# Altium PCB Hopper.PcbDoc
Units mm, origin at the board's own origin, x right, y up, seen from the top; angles counter-clockwise.
Board outline 62.5 x 37.5 mm, 2 copper layers (Top Layer, Bottom Layer), stack 1.58 mm thick; 97 components, 47 nets, 256 pads, 58 vias.
Unrouted connection lines stored in the file: 16.
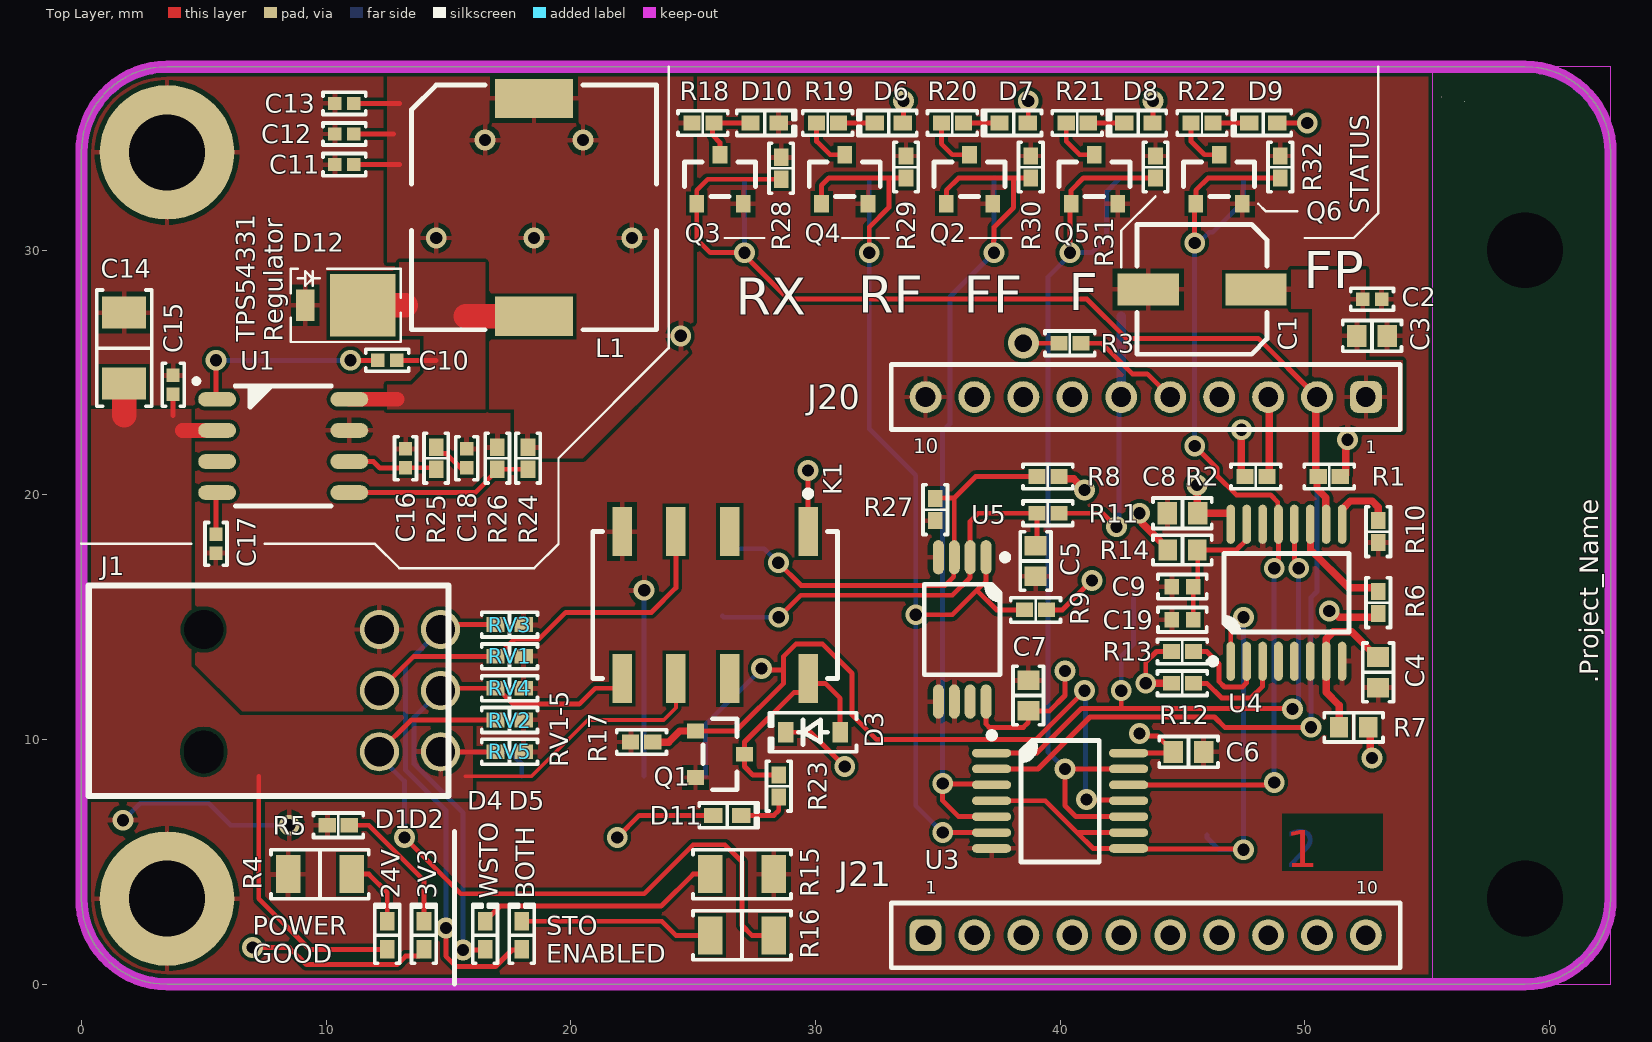
[diagram p0: Top Layer view]
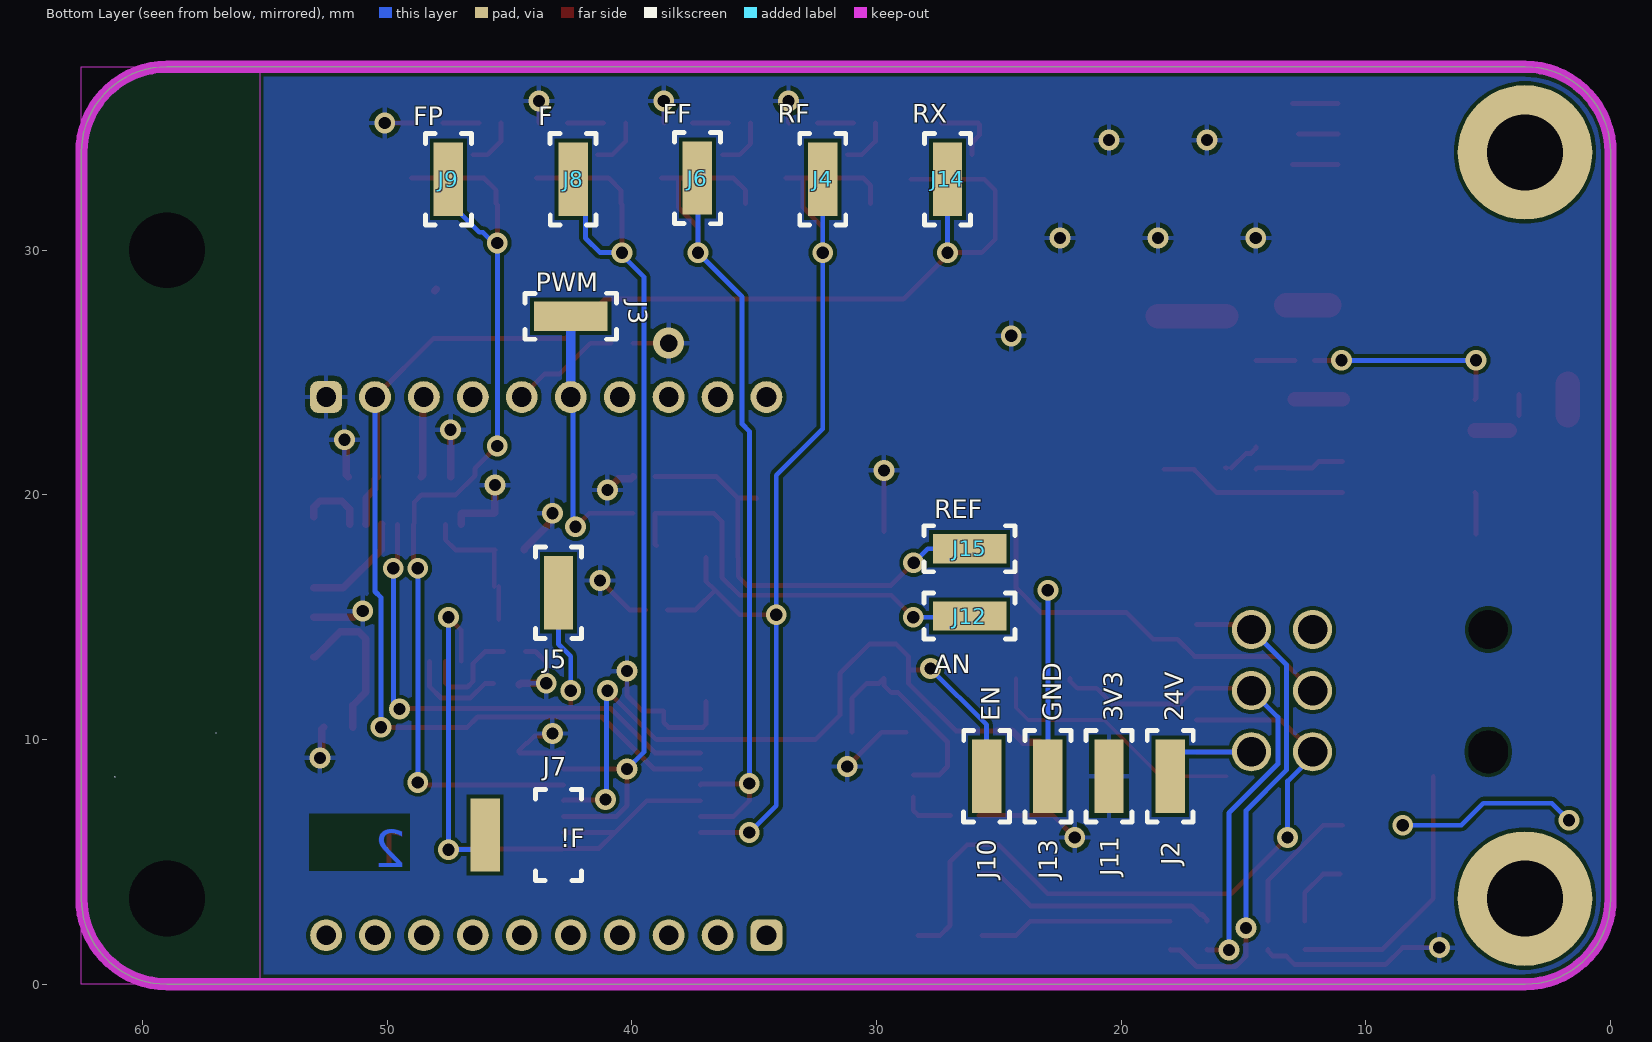
[diagram p1: Bottom Layer view, seen from below]

## Layer stack, top to bottom
Top Solder: solder mask 0.01, Solder Resist, Dk 3.5
Top Layer: signal copper 0.035
Dielectric 1: dielectric 1.51, FR-4, Dk 4.8
Bottom Layer: signal copper 0.035
Bottom Solder: solder mask 0.01, Solder Resist, Dk 3.5

## Board outline
0,3.5 0,34 cw(c3.5,34) 3.5,37.5 59,37.5 cw(c59,34) 62.5,34 62.5,3.5 cw(c59,3.5) 59,0 3.5,0 cw(c3.5,3.5)

## Design rules (kind name [scope] priority, off if disabled: settings)
BoardOutlineClearance [All] p1: gap=0.25 ignorepadtopadclearanceinfootprint=FALSE except(0: Arc-SplitContinuation Track-SplitContinuation SMDPad-SplitContinuation THPad-SplitContinuation Via-SplitContinuation Fill-SplitContinuation Poly-SplitContinuation Region-SplitContinuation Text-SplitContinuation)
Clearance Clearance-xPP-xTP-xTT [All] p1: gap=0.15 ignorepadtopadclearanceinfootprint=FALSE except(0: Arc-Hole Track-Hole SMDPad-Hole THPad-Hole Via-Hole Fill-Hole Poly-Hole Region-Hole Text-Hole)
ComponentClearance [All] p1: gap=0.25 collisioncheckmode=3 verticalgap=0.25 showdistances=FALSE
DiffPairsRouting [All] p1: maxlimit=0.25 minlimit=0.25 mostfreqgap=0.25 toplayer_minwidth=0.381 toplayer_maxwidth=0.381 toplayer_prefwidth=0.381 bottomlayer_minwidth=0.381 bottomlayer_maxwidth=0.381 bottomlayer_prefwidth=0.381 maxuncoupledlength=12.5
Height [All] p1: minheight=0 maxheight=25 prefheight=12.5
HoleSize HoleSize-PTH [All] p1: absolutevalues=TRUE maxlimit=10 minlimit=0.25 maxpercent=80.000 minpercent=20.000
HoleToHoleClearance [All] p1: gap=0.35 allowstackedmicrovias=TRUE
MinimumAnnularRing "Minimum IAR  >0.45mm" [((ObjectKind = 'Pad') OR (ObjectKind = 'Via')) And (Layer = 'MultiLayer') And (HoleDiameter > AsMM(0.45))] p1: minimumring=0.175 // minimum inner annular ring for pads > 0.45mm finished hole size
MinimumAnnularRing "Minimum IAR <=0.45mm" [((ObjectKind = 'Pad') OR (ObjectKind = 'Via')) And (Layer = 'MultiLayer') And (HoleDiameter <= AsMM(0.45))] p2: minimumring=0.175 // minimum inner annular ring for pads <= 0.45mm finished hole size
MinimumSolderMaskSliver [All] p1: minsoldermaskwidth=0.08
PlaneClearance PlaneClearance-IPI [All] p1: clearance=0.25
PlaneConnect [All] p1: planeconnectstyle=Relief reliefexpansion=0.175 reliefentries=4 reliefconductorwidth=0.2 reliefairgap=0.2
PolygonConnect PolygonConnect-xTW [All] p1: connectstyle=Relief reliefconductorwidth=0.2 reliefentries=4 polygonreliefangle="90 Angle" airgapwidth=0.2
RoomDefinition Hopper [InComponentClass('Hopper')] p1: confinementstyle=ConfineIn formatcopy=TRUE lockcomponents=FALSE outline 63.7,1.5 74.1,1.5 74.1,25.6 63.7,25.6
RoutingCorners [All] p1: cornerstyle=45-Degree minsetback=2.5 maxsetback=2.5
RoutingVias "RoutingVias > 0.45mm" [(ObjectKind = 'Via') And (HoleDiameter > AsMM(0.45))] p1: holewidth=0.5 width=0.85 viastyle="Through Hole" minholewidth=0.5 minwidth=0.85 maxholewidth=0.9 maxwidth=1.25 // finishet hole size > 0.45mm
RoutingVias "RoutingVias <= 0.45mm" [(ObjectKind = 'Via') And (HoleDiameter <= AsMM(0.45))] p2: holewidth=0.3 width=0.65 viastyle="Through Hole" minholewidth=0.25 minwidth=0.6 maxholewidth=0.45 maxwidth=0.8 // finishet hole size <= 0.45mm
SilkToSilkClearance [All] p1: silktosilkclearance=0.2
SilkToSolderMaskClearance SilkscreenOverComponentPads [IsPad] p1: minsilkscreentomaskgap=0.1 clearancetoexposedcopper=TRUE
SolderMaskExpansion [All] p1: expansion=0 istentingtop=FALSE
UnRoutedNet [All] p1: checkbadconnections=TRUE
Width Width-xTW [All] p1: maxlimit=1.5 minlimit=0.15 preferedwidth=0.2
18 further rules are at their usual default settings.

## Components (designator, comment, footprint, x,y, rotation, side; value= is the part's Value field where it differs from the comment)
C1 "100uF" "CAP ALSMD ELEC 5.3MM H5.8MM" 45.8,28.4 r180 top
C2 "100nF" "CAP 0402_1005 RF" 52.75,28 r180 top
C3 "47pF" "CAP 0603_1608 RF" 52.75,26.5 r180 top
C4 "1uF" "CAP 0603_1608 RF" 53,12.75 r90 top
C5 "10uF" "CAP 0603_1608 RF" 39,17.3 r90 top
C6 "100nF" "CAP 0603_1608 RF" 45.25,9.5 r180 top
C7 "100nF" "CAP 0603_1608 RF" 38.7,11.8 r270 top
C8 "100nF" "CAP 0603_1608 RF" 45,19.25 r0 top
C9 "10uF" "CAP 0402_1005" 45,16.25 r0 top
C10 "100nF" "CAP 0402_1005 RF" 12.5,25.5 r0 top
C11 "100nF" "CAP 0402_1005 RF" 10.75,33.5 r0 top
C12 "10uF" "CAP 0402_1005 RF" 10.75,34.75 r0 top
C13 "10uF" "CAP 0402_1005 RF" 10.75,36 r0 top
C14 "10uF" "CAP 1206_3216" 1.75,26 r270 top
C15 "100nF" "CAP 0402_1005 RF" 3.75,24.5 r270 top
C16 "10pF" "CAP 0402_1005 RF" 13.25,21.5 r90 top
C17 "10nF" "CAP 0402_1005 RF" 5.5,18 r90 top
C18 "3.9nF" "CAP 0402_1005 RF" 15.75,21.5 r270 top
C19 "10uF" "CAP 0402_1005" 45,14.9 r0 top
D1 "150040VS73240" "LED 0402_1005 GREEN" 12.5,2 r90 top
D2 "150040VS73240" "LED 0402_1005 GREEN" 14,2 r90 top
D3 "1N4148" SOD323 29.9,10.3 r180 top
D4 "150040VS73240" "LED 0402_1005 GREEN" 16.5,2 r90 top
D5 "150040VS73240" "LED 0402_1005 GREEN" 18,2 r90 top
D6 "150040RS73240" "LED 0402_1005 RED" 33,35.2 r180 top
D7 "150040RS73240" "LED 0402_1005 RED" 38.1,35.2 r180 top
D8 "150040RS73240" "LED 0402_1005 RED" 43.2,35.2 r180 top
D9 "150040RS73240" "LED 0402_1005 RED" 48.3,35.2 r180 top
D10 "150040RS73240" "LED 0402_1005 RED" 27.925,35.2 r0 top
D11 "150040RS73240" "LED 0402_1005 RED" 26.4,6.9 r0 top
D12 "SS3P5-M3/84A" DO-220AA 9.149,27.75 r0 top
J1 "105314-1206" "MOLEX 1053141206" 5,12 r270 top locked
J2 "5015" FP-5015-MFG-RF#1 18,8.5 r270 bottom
J3 "5015" FP-5015-MFG-RF#1 42.5,27.3 r0 bottom
J4 "5015" FP-5015-MFG-RF#1 32.2,32.9 r270 bottom
J5 "5015" FP-5015-MFG-RF#1 43,16 r90 bottom
J6 "5015" FP-5015-MFG-RF#1 37.325,32.95 r270 bottom
J7 "5015" FP-5015-MFG-RF#2 43,6.1 r90 bottom
J8 "5015" FP-5015-MFG-RF#1 42.4,32.9 r270 bottom
J9 "5015" FP-5015-MFG-RF#1 47.5,32.9 r270 bottom
J10 "5015" FP-5015-MFG-RF#1 25.5,8.5 r90 bottom
J11 "5015" FP-5015-MFG-RF#1 20.5,8.5 r270 bottom
J12 "5015" FP-5015-MFG-RF#1 26.2,15.05 r0 bottom
J13 "5015" FP-5015-MFG-RF#1 23,8.5 r270 bottom
J14 "5015" FP-5015-MFG-RF#1 27.1,32.9 r270 bottom
J15 "5015" FP-5015-MFG-RF#1 26.2,17.8 r0 bottom
J20 "62001011821" 62001011821 43.5,24 r180 top
J21 "62001011821" 62001011821 43.5,2 r0 top
K1 "1462037-1" "TE IM Relay Gullwing" 25.9,15.5 r180 top locked
L1 "SRR1050A-180Y" "INDUCTOR SMD SHIELDED 10x10mm" 18.5,31.75 r180 top
Q1 "2N7002,215" "NEXPERIA SOT-23-3" 26.1,9.4 r0 top
Q2 "2N7002,215" "NEXPERIA SOT-23-3" 36.3,32.9 r90 top
Q3 "2N7002,215" "NEXPERIA SOT-23-3" 26.1,32.9 r90 top
Q4 "2N7002,215" "NEXPERIA SOT-23-3" 31.2,32.9 r90 top
Q5 "2N7002,215" "NEXPERIA SOT-23-3" 41.4,32.9 r90 top
Q6 "2N7002,215" "NEXPERIA SOT-23-3" 46.5,32.9 r90 top
R1 "10k" "RES 0402_1005 RF" 51,20.75 r0 top
R2 "10k" "RES 0402_1005 RF" 48,20.75 r180 top
R3 "10k" "RES 0402_1005 RF" 40.4,26.2 r180 top
R4 "2.7k" "RES 1206_3216 RF" 9.75,4.5 r0 top
R5 "180R" "RES 0402_1005 RF" 10.5,6.5 r0 top
R6 "10k" "RES 0402_1005 RF" 53,15.6 r270 top
R7 "39k" "RES 0603_1608 RF" 52,10.5 r0 top
R8 "10k" "RES 0402_1005 RF" 39.5,20.75 r0 top
R9 "10k" "RES 0402_1005 RF" 39,15.3 r0 top
R10 "10k" "RES 0402_1005 RF" 53,18.5 r90 top
R11 "10k" "RES 0402_1005 RF" 39.5,19.25 r180 top
R12 "10k" "RES 0402_1005 RF" 45,12.3 r180 top
R13 "10k" "RES 0402_1005 RF" 45,13.6 r180 top
R14 "680k" "RES 0603_1608 RF" 45,17.75 r180 top
R15 "2.7k" "RES 1206_3216 RF" 27,4.5 r180 top
R16 "2.7k" "RES 1206_3216 RF" 27,2 r180 top
R17 "100k" "RES 0402_1005 RF" 22.9,9.9 r0 top
R18 "270R" "RES 0402_1005 RF" 25.4,35.2 r180 top
R19 "270R" "RES 0402_1005 RF" 30.5,35.2 r0 top
R20 "270R" "RES 0402_1005 RF" 35.6,35.2 r0 top
R21 "270R" "RES 0402_1005 RF" 40.7,35.2 r0 top
R22 "270R" "RES 0402_1005 RF" 45.8,35.2 r0 top
R23 "270R" "RES 0402_1005 RF" 28.5,8.1 r270 top
R24 "10k" "RES 0402_1005 RF" 18.25,21.5 r90 top
R25 "13k" "RES 0402_1005 RF" 14.5,21.5 r270 top
R26 "3k3" "RES 0402_1005 RF" 17,21.5 r270 top
R27 "10k" "RES 0402_1005 RF" 34.9,19.4 r90 top
R28 "100k" "RES 0402_1005 RF" 28.6,33.35 r270 top
R29 "100k" "RES 0402_1005 RF" 33.7,33.4 r270 top
R30 "100k" "RES 0402_1005 RF" 38.8,33.4 r270 top
R31 "100k" "RES 0402_1005 RF" 43.9,33.4 r270 top
R32 "100k" "RES 0402_1005 RF" 49,33.4 r270 top
RV1 "EZA-EG2A50AX" "RES 0402_1005" 17.5,13.4 r180 top
RV2 "EZA-EG2A50AX" "RES 0402_1005" 17.5,10.8 r180 top
RV3 "EZA-EG2A50AX" "RES 0402_1005" 17.5,14.7 r180 top
RV4 "EZA-EG2A50AX" "RES 0402_1005" 17.5,12.1 r180 top
RV5 "EZA-EG2A50AX" "RES 0402_1005" 17.5,9.5 r180 top
U1 "TPS54331GDR" "TI SOIC-8 D0008A" 8.25,22 r0 top
U3 "CD4001BPWR" "TI TSSOP-14 PW" 40,7.5 r0 top
U4 "CD74HC123PW" "TI TSSOP-16 PW" 49.25,16 r90 top
U5 "LM393PT" "ST TSSOP-8" 36,14.5 r270 top

## Footprints (in the part's own frame and the unit in brackets; to place one, negate y for a bottom-side part, rotate by r counter-clockwise, add the part's x,y. Pads: shape width x height; smd on the part's side, far side on the other; paste and mask are expansions set on the pad)
62001011821 [mm] "Socket Header, Pitch 2.00 mm, THT, Vertical, single row, 10p"
  rrect50% 1.3x1.3 hole 0.8: 1(-9,0)
  round 1.3 hole 0.8: 2(-7,0) 3(-5,0) 4(-3,0) 5(-1,0) 6(1,0) 7(3,0) 8(5,0) 9(7,0) 10(9,0)
  silkscreen extent -10.4,-1.33 10.4,1.33, body extent -10.25,-1.25 10.25,1.25, height 4.35
"CAP 0402_1005" [mm] "Chip Capacitor, 2-Leads, Body 1.02x0.51mm, IPC Medium Density"
  rect 0.6x0.64 smd: 1(-0.44,0) 2(0.44,0)
  silkscreen extent -1,-0.5 1,0.5, body extent -0.5,-0.26 0.5,0.26, height 0.52
"CAP 0402_1005 RF" [mm] "Chip Capacitor, 2-Leads, Body 1.02x0.51mm, IPC High Density"
  rect 0.55x0.54 smd: 1(-0.39,0) 2(0.39,0)
  silkscreen extent -0.87,-0.45 0.87,0.45, body extent -0.5,-0.26 0.5,0.26, height 0.52
"CAP 0603_1608 RF" [mm] "Chip Capacitor, 2-Leads, Body 1.60x0.80mm, IPC High Density"
  rect 0.8x0.9 smd: 1(-0.625,0) 2(0.625,0)
  silkscreen extent -1.2,-0.63 1.2,0.63, body extent -0.8,-0.41 0.8,0.41, height 0.82
"CAP 1206_3216" [mm] "Chip Capacitor, 2-Leads, Body 3.25x1.60mm, IPC Medium Density"
  rect 1.3x1.8 smd: 1(-1.45,0) 2(1.45,0)
  silkscreen extent -2.37,-1.12 2.37,1.12, body extent -1.6,-0.81 1.6,0.81, height 1.62
"CAP ALSMD ELEC 5.3MM H5.8MM" [mm] "Aluminum SMD Electrolytic Capacitor, 5.30mm Land Size, 5.00mm Diameter, 5.80mm Height, 5.50mm Maximum Leads Span"
  rect 2.5x1.3 smd: 1(-2.2,0) 2(2.2,0)
  silkscreen extent -2.65,-2.65 2.65,2.65, body extent -2.75,-2.65 2.75,2.65, height 5.8
DO-220AA [mm] "Molded Diode, 2-Leads, Body 3.61x2.18mm"
  rect 0.762x1.27 smd: 1(0,0)
  rect 2.67x2.54 smd: 2(2.351,0)
  silkscreen extent -0.6,-1.5 3.9,1.5, body extent -0.33,-1 3.52,1.03, height 1
FP-5015-MFG-RF#1 [mm]
  rect 3x1.2 smd paste+0 mask+0: 1(0,0)
  silkscreen extent -1.86,-0.94 1.87,0.94
FP-5015-MFG-RF#2 [mm]
  rect 3x1.2 smd paste+0 mask+0: 1(0,3)
  silkscreen extent -1.86,-0.94 1.87,0.94
"INDUCTOR SMD SHIELDED 10x10mm" [mm]
  rect 3.2x1.6 smd: 1(0,4.45) 2(0,-4.45)
  silkscreen extent -5,-5 5,5, body extent -5,-5.11 5,5.11, height 4.7
"LED 0402_1005 GREEN" [mm] "Chip Diode, 2-Leads, Body 1.00x0.50mm, IPC Medium Density"
  rect 0.75x0.6 smd: 1(-0.575,0) 2(0.575,0)
  silkscreen extent -1.14,-0.51 1.27,0.51, body extent -0.5,-0.25 0.5,0.25, height 0.21
"LED 0402_1005 RED" [mm] "Chip Diode, 2-Leads, Body 1.00x0.50mm, IPC Medium Density"
  rect 0.75x0.6 smd: 1(-0.575,0) 2(0.575,0)
  silkscreen extent -1.14,-0.51 1.27,0.51, body extent -0.5,-0.25 0.5,0.25, height 0.21
"MOLEX 1053141206" [mm]
  round 1.6 hole 1.2: 1(2.5,9.68) 2(0,9.68) 3(-2.5,9.68) 4(2.5,7.18) 5(0,7.18) 6(-2.5,7.18)
  round 1 hole 1.6 unplated: 14(-2.5,0)
  round 1 hole 1.6 slot 1.75 at 0 deg unplated: 15(2.5,0)
  silkscreen extent -4.3,-4.7 4.3,10, body extent -4.22,-4.67 4.22,9.99, height 9.15
"NEXPERIA SOT-23-3" [mm] "SOT23, 3-Leads, Body 2.90x2.40mm, Pitch 0.95mm, IPC Medium Density"
  rect 0.7x0.6 smd: 1(-1,0.95) 2(-1,-0.95) 3(1,0)
  silkscreen extent -0.7,-1.45 0.7,1.45, body extent -1.16,-1.45 1.16,1.45, height 1.5
"RES 0402_1005" [mm] "Chip Resistor, 2-Leads, Body 1.0x0.5mm, IPC Medium Density"
  rect 0.75x0.6 smd: 1(-0.575,0) 2(0.575,0)
  silkscreen extent -1.14,-0.51 1.14,0.51, body extent -0.5,-0.25 0.5,0.25, height 0.35
"RES 0402_1005 RF" [mm] "Chip Resistor, 2-Leads, Body 1.0x0.5mm, IPC High Density"
  rect 0.7x0.6 smd: 1(-0.45,0) 2(0.45,0)
  silkscreen extent -1.02,-0.51 1.02,0.51, body extent -0.5,-0.25 0.5,0.25, height 0.35
"RES 0603_1608 RF" [mm] "Chip Resistor, 2-Leads, Body 1.60x0.80mm, IPC High Density"
  rect 0.75x0.85 smd: 1(-0.6,0) 2(0.6,0)
  silkscreen extent -1.2,-0.6 1.2,0.6, body extent -0.8,-0.4 0.8,0.4, height 0.45
"RES 1206_3216 RF" [mm] "Chip Resistor, 2-Leads, Body 3.13x1.55mm, IPC High Density"
  rect 1x1.55 smd: 1(-1.3,0) 2(1.3,0)
  silkscreen extent -2,-1 2,1, body extent -1.6,-0.8 1.6,0.8, height 0.6
SOD323 [mm] "SOD, 2-Leads, Body 1.25x2.50mm, IPC Medium Density"
  rect 0.625x0.83 smd: 1(-1.112,0) 2(1.112,0)
  silkscreen extent -1.78,-0.8 1.78,0.8, body extent -1.36,-0.62 1.36,0.62, height 1.05
"ST TSSOP-8" [mm] "TSSOP, 8-Leads, Body 3.00x4.40mm, Pitch 0.65mm, IPC Medium Density"
  oval 1.4x0.45 smd: 1(-2.95,0.975) 2(-2.95,0.325) 3(-2.95,-0.325) 4(-2.95,-0.975) 5(2.95,-0.975) 6(2.95,-0.325) 7(2.95,0.325) 8(2.95,0.975)
  silkscreen extent -3.07,-1.55 1.85,1.88, body extent -3.21,-1.5 3.21,1.5, height 1.2
"TE IM Relay Gullwing" [mm] "SMT, 8-Leads, Body 10x6mm, Height 5.65mm"
  rect 0.8x2 smd: 1(-3.8,-3) 2(-0.6,-3) 3(1.6,-3) 4(3.8,-3) 5(3.8,3) 6(1.6,3) 7(-0.6,3) 8(-3.8,3)
  silkscreen extent -5,-4.67 5,3, body extent -5,-3 5,3, height 5.65
"TI SOIC-8 D0008A" [mm] "Package SOIC-8, 8-Leades, 4.90 x 3.89 mm Body , Pitch 1.27 mm"
  oval 1.55x0.6 smd: 1(-2.7,1.905) 2(-2.7,0.635) 3(-2.7,-0.635) 4(-2.7,-1.905) 5(2.7,-1.905) 6(2.7,-0.635) 7(2.7,0.635) 8(2.7,1.905)
  silkscreen extent -3.65,-2.45 2.05,2.75, body extent -3,-2.45 3,2.45, height 1.75
"TI TSSOP-14 PW" [mm] "TSSOP, 14-Leads, Body 5.00x4.40mm, Pitch 0.65mm, IPC Medium Density"
  oval 1.6x0.35 smd: 1(-2.8,1.95) 2(-2.8,1.3) 3(-2.8,0.65) 4(-2.8,0) 5(-2.8,-0.65) 6(-2.8,-1.3) 7(-2.8,-1.95) 8(2.8,-1.95) 9(2.8,-1.3) 10(2.8,-0.65) 11(2.8,0) 12(2.8,0.65) 13(2.8,1.3) 14(2.8,1.95)
  silkscreen extent -2.92,-2.5 1.6,2.8, body extent -3.21,-2.5 3.21,2.5, height 1.2
"TI TSSOP-16 PW" [mm] "TSSOP, 16-Leads, Body 5.00x4.40mm, Pitch 0.65mm, IPC Medium Density"
  oval 1.6x0.35 smd: 1(-2.8,2.275) 2(-2.8,1.625) 3(-2.8,0.975) 4(-2.8,0.325) 5(-2.8,-0.325) 6(-2.8,-0.975) 7(-2.8,-1.625) 8(-2.8,-2.275) 9(2.8,-2.275) 10(2.8,-1.625) 11(2.8,-0.975) 12(2.8,-0.325) 13(2.8,0.325) 14(2.8,0.975) 15(2.8,1.625) 16(2.8,2.275)
  silkscreen extent -2.92,-2.55 1.6,3.12, body extent -3.21,-2.5 3.21,2.5, height 1.2

## Part data
C1: library part C_POL, "Generic Polarised Capacitor", Tolerance=20%, Voltage Rating=16V, Capacitance=100uF, Diameter=5mm, Height=5.8mm, Size Code="D5.0 x H5.8"
C2 C10 C11 C15 C17 C18: library part C, "Generic Capacitor", Temperature Coefficient=X7R, Tolerance=10%, Voltage Rating=50V, Size Code=0402
  C2 C10 C11 C15: Capacitance=100nF
  C17: Capacitance=10nF
  C18: Capacitance=3.9nF
C3: library part C, "Capacitor", Dielectric=C0G, Tolerance=20%, Voltage Rating=50V, Capacitance=47pF, Size Code=0603
C4: library part C, "Capacitor", Dielectric=X7R, Tolerance=20%, Voltage Rating=10V, Capacitance=1uF, Size Code=0603
C5: library part C, "Capacitor", Dielectric=X5R, Tolerance=10%, Voltage Rating=10V, Capacitance=10uF, Size Code=0603
C6 C7 C8: library part C, "Capacitor", Dielectric=X7R, Tolerance=20%, Voltage Rating=25V, Capacitance=100nF, Size Code=0603
C9 C12 C13 C19: library part C, "Generic Capacitor", Temperature Coefficient=X5R, Tolerance=20%, Voltage Rating=6.3V, Capacitance=10uF, Size Code=0402
C14: library part C, "Generic Capacitor", Temperature Coefficient=X5R, Tolerance=10%, Voltage Rating=50V, Capacitance=10uF, Size Code=1206
C16: library part C, "Generic Capacitor", Temperature Coefficient=C0G, Tolerance=5%, Voltage Rating=50V, Capacitance=10pF, Size Code=0402
D1 D2 D4 D5: library part LED_GREEN_0402, "Green SMD LED, 0402, 20mA Ic, 2V", Case Size=0402, Colour=Green, Forward Current=20mA, Forward Voltage=2.0V, Luminous Intensity=50mcd, Manufacturer Part Number=150040VS73240, Wavelength=570nm
D3: "Signal Diode VR=75V IF=150mA Trr=4ns P=200mW", Average Rectified Current=150mA, Capacitance=2pF, Forward Current=300mA, Forward Voltage=1.25V, Manufacturer=Diodes, Manufacturer Part Number=1N4148WS-7-F, Max Forward Surge Current (Ifsm)=2A, Max Operating Temperature=150°C, Max Repetitive Reverse Voltage (Vrrm)=75V, Max Reverse Current=1uA, Min Operating Temperature=-65°C, Package Quantity=3000, Power Dissipation=200mW, Supplier Part Number 1=9228070, Category="Rectifier Diodes", Colloquial=1N4148, Contact Plating=Tin,Matte, Current Rating=150mA, Element Configuration=Single, Height=1mm, Lead Free="Lead Free", Length=1.8mm, Max Reverse Voltage (DC)=75V, Max Surge Current=2A, Mount="Surface Mount", Number of Pins=2, Output Current=150mA, Packaging="Tape and Reel", Peak Non-Repetitive Surge Current=2A, Polarity=Standard, Power Rating=200mW, Pricing 1="3000=0.03600, 6000=0.03200, 12000=0.02900, 30000=0.02700, 60000=0.02300 (USD)", Radiation Hardening=No, REACH SVHC="No SVHC", Recovery Time=4ns, Reverse Recovery Time=4ns, Reverse Recovery Time-Max=4ns, RoHS=Yes, RoHS Compliant=Yes, Series=-, Stock 1=18000, Supplier 1=RSComponents, Voltage=75V, Voltage Rating (DC)=75V, Weight=0.000173oz, Width=1.4mm
D6 D7 D8 D9 D10 D11: library part LED_RED_0402, "Red SMD LED, 0402, 20mA Ic, 2V", Case Size=0402, Colour=Red, Forward Current=20mA, Forward Voltage=2.0V, Luminous Intensity=100mcd, Manufacturer Part Number=150040RS73240, Wavelength=625nm
D12: "VISHAY   SS3P5-M3/84A   DIODE, RECTIFIER, SCHOTTKY, 3A, 50V, SMP", Average Rectified Current=3A, Case/Package=DO-220AA, Forward Voltage=780mV, Manufacturer=Vishay, Max Forward Surge Current (Ifsm)=45A, Max Operating Temperature=150°C, Max Repetitive Reverse Voltage (Vrrm)=50V, Max Reverse Current=100uA, Min Operating Temperature=-55°C, Package Quantity=3000, Supplier Part Number 1=7103752P, Category="Rectifier Diodes", Colloquial=SS3P5, ComponentLink1Description=https://datasheet.ciiva.com/29591/ss3p5-29591977.pdf?src-supplier=Digi-Key, ComponentLink1URL=https://datasheet.ciiva.com/29591/ss3p5-29591977.pdf?src-supplier=Digi-Key, ComponentLink2Description=https://datasheet.ciiva.com/8289/ss3p5-8289162.pdf?src-supplier=Avnet, ComponentLink2URL=https://datasheet.ciiva.com/8289/ss3p5-8289162.pdf?src-supplier=Avnet, ComponentLink3Description=https://datasheet.ciiva.com/7962/ss3p5-7962430.pdf?src-supplier=Element14, ComponentLink3URL=https://datasheet.ciiva.com/7962/ss3p5-7962430.pdf?src-supplier=Element14, Element Configuration=Single, Forward Current=3A, Height=1.15mm, Length=3.61mm, Manufacturer Part Number=SS3P5-M3/84A, Max Reverse Voltage (DC)=50V, Mount="Surface Mount", Number of Pins=2, Packaging="Tape and Reel", Peak Non-Repetitive Surge Current=45A, Pricing 1="10=0.45800, 50=0.45100 (USD)", Radiation Hardening=No, REACH SVHC=Unknown, RoHS=Yes, RoHS Compliant=Yes, Series=eSMP®, Stock 1=1, Supplier 1=RSComponents, Weight=0.000847oz, Width=2.18mm
J1: library part "Nano-Fit RA TH 6 Way Header Dual Row", "Nano-Fit Right Angle Header; Through Hole; 2.50mm; Dual Row; 6 Circuit; Gold Plated", Color=Black, Manufacturer=Molex, Supplier Part Number 1=2576871, Category="Headers and Wire Housings", Colloquial="Nano-Fit RA TH", Contact Material=Brass, Contact Plating=Gold, Gender=Male, Manufacturer Part Number=105314-1206, Mount="Through Hole", Number of Rows=2, Pricing 1="10=1.38000 (GBP)", REACH SVHC=Unknown, RoHS=Yes, RoHS Compliant=Yes, Stock 1=621, Supplier 1=Farnell, Termination="Through Hole"
J2 J3 J4 J5 J6 J7 J8 J9 J10 J11 J12 J13 J14 J15: "PC TEST POINT MINIATURE", Manufacturer=keystone, Automotive=No, Category=Conn, ComponentLink2Description=Datasheet, ComponentLink2URL=http://www.keyelco.com/product-pdf.cfm?p=1353, Conn Orientation=Straight, Contact Material=Silver, Device Class L1=Connectors, Device Class L2=unset, Device Class L3=unset, Digikey Description="PC TEST POINT MINIATURE", Height=1.65mm, Lead Free=Yes, Manufacturer Part Number=5015, Number of Contacts=1, Octopart=https://octopart.com/5015-keystone-3822, Package=5015, RoHS=TRUE
J20 J21: library part CMP-1502-01210-2, Contact Resistance=20mΩ, Current Rating=2A, Operating Supply Voltage=250V, Gender=Female, Lead Pitch=2mm, NexarPartId=65162168, Number of Pins=10, Orientation=Vertical, RoHS=Non-Compliant
K1: library part IM01G, "Signal Relay 3VDC 2A DPDT (( 10mm 7.5mm 5.65mm)) Surface Mount Automotive", Manufacturer="TE Connectivity Axicom", Category="Signal Relays", Colloquial="IM01G Relay", Manufacturer Part Number=1462037-1, Pricing 1="1=2.25000, 100=1.60000, 250=1.45000, 500=1.27000 (GBP)", RoHS=Yes, Stock 1=745
L1: "Inductor Power Shielded Wirewound 18uH 30% 100KHz Ferrite 3.1A 0.051Ohm DCR Automotive T/R", DC Resistance (DCR)=51mR, Inductance=18uH, Inductance Tolerance=30%, Manufacturer=Bourns, RMS Current (Irms)=3.1A, Saturation Current=3.2A, Supplier Part Number 1=652-SRR1050A-180Y, Category="Fixed Inductors", ComponentLink1Description=https://www.bourns.com/docs/Product-Datasheets/SRR1050A.pdf?src-supplier=Digi-Key, ComponentLink1URL=https://www.bourns.com/docs/Product-Datasheets/SRR1050A.pdf?src-supplier=Digi-Key, ComponentLink2Description=http://www.farnell.com/datasheets/2113225.pdf?src-supplier=Element14, ComponentLink2URL=http://www.farnell.com/datasheets/2113225.pdf?src-supplier=Element14, Manufacturer Part Number=SRR1050A-180Y, Mount="Surface Mount", Packaging="Cut Tape", Pricing 1="1=1.29000, 10=0.94500, 50=0.94500, 100=0.79400, 1000=0.68100, 10000=0.54800 (USD)", REACH SVHC="No SVHC", RoHS=Yes, RoHS Compliant=Yes, Stock 1=5557, Supplier 1=Mouser
Q1 Q2 Q3 Q4 Q5 Q6: library part 2N7002, "MOSFET N-CH 60V 300MA SOT-23", Manufacturer=Nexperia, Category=MOSFETs, ComponentLink1Description=http://www.farnell.com/datasheets/1499179.pdf?src-supplier=Farnell, ComponentLink1URL=http://www.farnell.com/datasheets/1499179.pdf?src-supplier=Farnell, ComponentLink2Description=https://assets.nexperia.com/documents/data-sheet/BSS138PS.pdf?src-supplier=Digi-Key, ComponentLink2URL=https://assets.nexperia.com/documents/data-sheet/BSS138PS.pdf?src-supplier=Digi-Key, ComponentLink3Description=https://assets.nexperia.com/documents/data-sheet/2N7002.pdf?src-supplier=Digi-Key, ComponentLink3URL=https://assets.nexperia.com/documents/data-sheet/2N7002.pdf?src-supplier=Digi-Key, ComponentLink4Description=http://www.farnell.com/datasheets/1499179.pdf?src-supplier=Newark, ComponentLink4URL=http://www.farnell.com/datasheets/1499179.pdf?src-supplier=Newark, Manufacturer Part Number=2N7002,215, Pricing 1="3000=0.05700, 9000=0.05640, 24000=0.05590, 45000=0.05530 (USD)", RoHS=Yes, RoHS Compliant=Yes, Stock 1=243000, Supplier 1="Arrow Electronics", Supplier Part Number 1=2N7002,215
R1 R2 R3 R5 R6 R8 R9 R10 R11 R12 R13 R17 R18 R19 R20 R21 R22 R23 R24 R25 R26 R27 R28 R29 R30 R31 R32: library part R, "Generic Resistor", Power Rating=62.5mW, Temperature Coefficient=100ppm/°C, Tolerance=1%, Voltage Rating=50V, Size Code=0402
  R1 R2 R3 R6 R8 R9 R10 R11 R12 R13 R24 R27: Resistance=10k
  R5: Resistance=180R
  R17 R28 R29 R30 R31 R32: Resistance=100k
  R18 R19 R20 R21 R22 R23: Resistance=270R
  R25: Resistance=13k
  R26: Resistance=3k3
R4 R15 R16: library part R, "Resistor", Power Rating=250mW, Temperature Coefficient=100ppm/°C, Tolerance=1%, Voltage Rating=200V, Resistance=2.7k, Size Code=1206
R7 R14: library part R, "Resistor", Power Rating=100mW, Temperature Coefficient=100ppm/°C, Tolerance=1%, Voltage Rating=75V, Size Code=0603
  R7: Resistance=39k
  R14: Resistance=680k
RV1 RV2 RV3 RV4 RV5: "EZAEG Series 100 Vcl 0.05 pF 0402 Surface Mount ESD Suppressor", Breakdown Voltage=15V, Capacitance=0.1pF, Case Code (Imperial)=0402, Case Code (Metric)=1005, Clamping Voltage=100V, Current Rating=2A, Manufacturer=Panasonic, Max Operating Temperature=125°C, Max Voltage Rating (DC)=30V, Min Operating Temperature=-55°C, Package Quantity=1, Working Voltage=500V, Case/Package=0402, Category=Varistors, Depth=0.5mm, Direction=Bidirectional, Element Configuration=Single, ESD Protection=Yes, Height=0.015inch, Lead Free="Lead Free", Length=1mm, Manufacturer Part Number=EZA-EG2A50AX, Mount="Surface Mount", Number of Channels=1, Number of Circuits=1, Number of Pins=2, Packaging="Tape and Reel", Polarity=Bidirectional, Pricing 1="1=0.35820, 10=0.30530, 25=0.26250, 100=0.22160, 250=0.18290, 500=0.15520, 1000=0.12540, 3000=0.11050 (USD)", Radiation Hardening=No, REACH SVHC=Unknown, RoHS=Yes, RoHS Compliant=Yes, Series=-, Stock 1=5580, Supplier 1="Arrow Electronics", Supplier Part Number 1=EZA-EG2A50AX, Termination=SMD/SMT, Test Current=2A, Voltage Rating (DC)=15V, Width=0.02inch
  RV5: Operating Supply Voltage=30V
U1: "3.5V to 28V Input, 3A, 570kHz Step-Down Converter with Eco-mode 8-SOIC -40 to 150", Case/Package=D, Manufacturer="Texas Instruments", Max Input Voltage=28V, Max Operating Temperature=150°C, Max Output Current=3A, Max Output Voltage=25V, Min Input Voltage=3.5V, Min Operating Temperature=-40°C, Min Output Voltage=800mV, Package Quantity=2500, Quiescent Current=110uA, Supplier Part Number 1=595-TPS54331GDR, Switching Frequency=570kHz, Category="Voltage Regulators - Switching", Colloquial=TPS54331, ComponentLink1Description=https://datasheet.ciiva.com/14378/tps54331-14378086.pdf?src-supplier=Avnet, ComponentLink1URL=https://datasheet.ciiva.com/14378/tps54331-14378086.pdf?src-supplier=Avnet, ComponentLink2Description=https://datasheet.ciiva.com/2034/tps54331-2034843.pdf?src-supplier=Digi-Key, ComponentLink2URL=https://datasheet.ciiva.com/2034/tps54331-2034843.pdf?src-supplier=Digi-Key, Lead Free="Lead Free", Manufacturer Part Number=TPS54331GDR, Number of Outputs=1, Number of Pins=8, Operating Supply Voltage=28V, Output Current=3A, OUTPUT TYPE=Adjustable, Output Voltage=25V, Packaging="Tape and Reel", Pricing 1="1=1.85000, 10=1.67000, 25=1.57000, 50=1.57000, 100=1.34000, 250=1.26000, 500=1.10000, 1000=0.91100, 2500=0.91000, 10000=0.91000 (USD)", RoHS=Yes, RoHS Compliant=Yes, Series="SWIFT™, Eco-Mode™", Supplier 1=Mouser, Synchronous Rectifier=No
U3: "4-ch, 2-input, 3-V to 18-V NOR gates 14-TSSOP -55 to 125", Case/Package=TSSOP, High Level Output Current=-4.2mA, Low Level Output Current=4.2mA, Manufacturer="Texas Instruments", Max Operating Temperature=125°C, Max Supply Voltage=18V, Min Operating Temperature=-55°C, Min Supply Voltage=3V, Output Current=6.8mA, Package Quantity=1, Quiescent Current=5uA, Supplier Part Number 1=595-CD4001BPWR, Category="Logic Gates", Colloquial=4001, Contact Plating=Gold, Lead Free="Lead Free", Logic Function="NOR GATE", Manufacturer Part Number=CD4001BPWR, Mount="Surface Mount", Number of Bits=4, Number of Circuits=4, Number of Elements=4, Number of Gates=4, Number of Input Lines=2, Number of Inputs=2, Number of Output Lines=1, Number of Outputs=1, Number of Pins=14, Packaging="Tape and Reel", Pricing 1="1=0.59000, 10=0.50200, 50=0.50200, 100=0.34800, 1000=0.22800, 10000=0.20700 (USD)", Propagation Delay=90ns, Radiation Hardening=No, REACH SVHC="No SVHC", RoHS=Yes, RoHS Compliant=Yes, Series=4000B, Supplier 1=Mouser, Supplier 2=Digi-Key, Supplier 3=Digi-Key, Supplier Part Number 2=296-32851-5-ND, Supplier Part Number 3=NLV14001BDTR2G-ND, Technology=CMOS, Turn-On Delay Time=90ns, Weight=0.002018oz
U4: library part 74HC123, "High Speed CMOS Logic Dual etriggerable Monostable Multivibrators with eset 16-TSSOP -55 to 125", Case/Package=TSSOP, High Level Output Current=-5.2mA, Low Level Output Current=5.2mA, Max Operating Temperature=125°C, Max Supply Voltage=6V, Min Operating Temperature=-55°C, Min Supply Voltage=2V, Operating Supply Voltage=5V, Package Quantity=90, Quiescent Current=8uA, Supplier Part Number 1=595-CD74HC123PW, Category="Timers and Oscillators", Colloquial=74HC123, Height=1.15mm, Independent Circuits=2, Lead Free="Lead Free", Length=5mm, Logic Function=Multivibrator, Manufacturer Part Number=CD74HC123PW, Mount="Surface Mount", Number of Bits=2, Number of Elements=2, Number of Pins=16, Output Current=5.2mA, Packaging=Rail/Tube, Pricing 1="1=1.19000, 10=1.08000, 50=1.02000, 100=0.83600, 1000=0.69000, 10000=0.52700 (USD)", Propagation Delay=25ns, Radiation Hardening=No, REACH SVHC="No SVHC", RoHS=Yes, Schmitt Trigger Input=Yes, Stock 1=1774, Supplier 1=Mouser, Supplier 2=Mouser, Supplier Part Number 2=771-74HC123PW-T, Turn-On Delay Time=54ns, Weight=0.002183oz, Width=4.4mm
U5: library part LM393, "Comparator Dual 18V/36V 8-Pin TSSOP T/R", Case/Package=TSSOP, Input Bias Current=250nA, Input Offset Voltage (Vos)=5mV, Manufacturer=ST, Max Dual Supply Voltage=18V, Max Operating Temperature=70°C, Max Power Dissipation=625mW, Max Supply Current=1mA, Max Supply Voltage=36V, Min Dual Supply Voltage=1V, Min Operating Temperature=0°C, Min Supply Voltage=2V, Natural Thermal Resistance=120°C/W, Output Current=18mA, Output Current per Channel=100pA, Package Quantity=1, Quiescent Current=2.5mA, Supplier Part Number 1=69AH0634, Voltage Gain=106.02dB, Category=Comparators, Colloquial=LM393, ComponentLink1Description=https://datasheet.ciiva.com/15131/getdatasheetpartid-186418-15131021.pdf?src-supplier=Verical, ComponentLink1URL=https://datasheet.ciiva.com/15131/getdatasheetpartid-186418-15131021.pdf?src-supplier=Verical, ComponentLink2Description=https://datasheet.ciiva.com/1827/cd00000465-1827201.pdf?src-supplier=Digi-Key, ComponentLink2URL=https://datasheet.ciiva.com/1827/cd00000465-1827201.pdf?src-supplier=Digi-Key, ComponentLink3Description=https://datasheet.ciiva.com/1827/cd00000465-1827202.pdf?src-supplier=Digi-Key, ComponentLink3URL=https://datasheet.ciiva.com/1827/cd00000465-1827202.pdf?src-supplier=Digi-Key, ComponentLink4Description=https://datasheet.ciiva.com/1827/cd00000465-1827203.pdf?src-supplier=Digi-Key, ComponentLink4URL=https://datasheet.ciiva.com/1827/cd00000465-1827203.pdf?src-supplier=Digi-Key, ComponentLink5Description=https://datasheet.ciiva.com/2971/cd00000465-2971959.pdf?src-supplier=Avnet, ComponentLink5URL=https://datasheet.ciiva.com/2971/cd00000465-2971959.pdf?src-supplier=Avnet, ComponentLink6Description=https://datasheet.ciiva.com/16381/cd00000465-16381559.pdf?src-supplier=Future+Electronics, ComponentLink6URL=https://datasheet.ciiva.com/16381/cd00000465-16381559.pdf?src-supplier=Future+Electronics, Lead Free="Lead Free", Manufacturer Part Number=LM393PT, Max Input Current=250nA, Mount="Surface Mount", Nominal Supply Current=1mA, Number of Channels=2, Number of Elements=2, Number of Pins=8, OUTPUT TYPE=TTL, Packaging="Tape and Reel", Power Dissipation=625mW, Pricing 1="1=0.55700, 5=0.55700, 10=0.47600, 25=0.44300, 50=0.37500, 100=0.30600, 250=0.25300, 500=0.20100, 1000=0.16500 (USD)", Radiation Hardening=No, Response Time=1.3us, RoHS=Yes, RoHS Compliant=Yes, Series=LM393, Stock 1=4000, Supplier 1=Newark, Supply Current=1mA, Technology=BIPOLAR, Type="General Purpose"

## Free pads (board coordinates)
  round 5.5 hole 3.1 mask+0: 1(3.5,3.5) 1(3.5,34)
  round 0 hole 3.1 mask+0: 1(59,3.5) 1(59,30)

## Via types
v1: diameter 0.85, hole 0.5, Top Layer to Bottom Layer, 57 vias
v2: diameter 1.27, hole 0.711, Top Layer to Bottom Layer, 1 vias

## Nets (pads, with @x,y where several pads share a name; then routed paths per layer and width w, separated by ;. In a path a pad name is that pad's centre, name@x,y a point inside that pad or via, vN(x,y) a via of type N, cw(c..) or ccw(c..) an arc to the next point about the centre after c; other vN are vias at no path point)
3V3: C1.1 C2.2 C3.2 C6.2 C7.2 C8.2 C11.2 C12.2 C13.2 D2.1 D3.2 D6.1 D7.1 D8.1 D9.1 D11.1 J11.1 J20.1 K1.1 L1.2 R1.2 R2.2 R3.2 R6.2 R7.2 R8.2 R9.2 R12.2 R13.2 R14.2 R18.2 R24.2 U3.14 U4.16 U5.8 | length 56.2
  Top Layer w0.2: v1(7,1.5) 8.5,1.5 9.2,0.8 12.904,0.8 13.254,1.15 13.8,1.15 14,1.35 D2.1 ; C11.2 13,33.5 ; C12.2 12.75,34.75 ; C13.2 13,36 ; v1(21.9,6) 22.8,6.9 D11.1 ; D3.2 29.8,10.3 v1(31.2,8.9) ; K1.1 v1(29.7,21) ; D6.1 33.6,35.225 v1(33.6,36.1) ; U5.8 36.975,10.625 37.1,10.5 38.5,10.5 38.7,10.7 C7.2 39.575,11.175 40.2,11.8 v1(40.2,12.8) ; v2(38.5,26.2) R3.2 ; D7.1 38.7,35.225 v1(38.7,36.1) ; R9.2 40.1,15.3 v1(41.3,16.5) ; U3.14 44.575,9.45 C6.2 44.625,9.55 44.325,9.85 44.275,9.85 43.975,10.15 43.35,10.15 v1(43.25,10.25) ; v1(43.5,12.3) 43.5,13.16 43.94,13.6 R13.2@44.35,13.6 ; D8.1 43.8,35.225 v1(43.8,36.1) ; D9.1 v1(50.1,35.2)
  Top Layer w0.305: R8.2 40.038,20.662 40.549,20.662 41,20.211 v1(41,20.2) ; v1(43.25,19.25) 43.354,19.146 43.354,18.846 44.4,17.8 R14.2 ; v1(43.5,12.3) 43.624,12.3 44.552,12.3 44.6,12.252 R12.2@44.6,12.25 ; v1(45.6,20.4) 45.612,20.388 45.612,19.263 C8.2 46.954,19.25 46.975,19.229 U4.16 ; R2.2@47.4,20.75 47.4,22.654 v1(47.411,22.665) ; C1.1 C1.1@48.05,28.35 ; v1(51,15.25) 51.148,15.25 51.398,15 R6.2@53,15 ; R1.2@51.6,20.75 51.675,20.825 51.675,22.175 v1(51.75,22.25) ; R7.2 52.675,10.425 52.675,9.325 v1(52.75,9.25)
  other v1: 24.5,26.5 14.5,30.5 18.5,30.5 22.5,30.5 16.5,34.5 20.5,34.5
24V: C14.2 C15.2 D1.1 J1.1 J2.1 K1.6 RV5.2 U1.2 | length 31.9
  Top Layer w0.15: 15.7,8.5 18.4,8.5 20.7,10.8 23.8,10.8 24.3,11.3 K1.6
  Top Layer w0.2: 3.75,23.25 C15.2 ; 7.25,8.5 7.25,3.5 9.325,1.425 D1.1 ; J1.1 RV5.2
  Top Layer w0.6: 4.135,22.635 U1.2
  Top Layer w1: 1.75,23.25 C14.2
  Bottom Layer w0.2: J1.1 17.5,9.5 18,9 J2.1
F\A\U\L\T\: J7.1 U3.4 U3.8 U3.9 U4.1 | length 26.6
  Top Layer w0.2: U3.4 39.4,7.5 40.7,6.2 ; U3.9 40.7,6.2 ; U4.1 46.975,14.475 v1(47.5,15) ; v1(47.5,5.5) 47.475,5.525 44.5,5.525 42.825,5.525 U3.8 41.35,5.55 40.7,6.2
  Bottom Layer w0.2: J7.1 46,6 46.5,5.5 v1(47.5,5.5) v1(47.5,15)
FAST_FAULT: J6.1 Q2.1 R30.2 U3.3 U3.5 | length 38.3
  Top Layer w0.2: v1(35.2,8.2) 35.2,7.5 35.85,6.85 U3.5 ; v1@35.25,8.179 35.25,8.25 35.321,8.179 37.172,8.179 U3.3 ; Q2.1 35.35,32.45 35.85,32.95 38.1,32.95 ; v1(37.3,29.9) 37.277,29.923 37.277,30.4 37.3,30.423 37.3,30.946 38.1,31.746 38.1,32.95 ; R30.2 38.1,32.95
  Bottom Layer w0.2: v1(35.2,8.2) 35.2,22.6 35.5,22.9 35.5,28.1 v1(37.3,29.9) 37.3,32.925 J6.1
FAST_MONO_Q\: J5.1 U3.1 U4.12 | length 25.7
  Top Layer w0.2: U3.1 39.05,9.45 40.875,11.275 42.5,11.275 ; v1(42.5,12) 42.5,11.275 ; v1(49.5,11.25) 49.475,11.275 42.5,11.275 ; U4.12 49.575,17.351 49.75,17.176 v1(49.75,17)
  Bottom Layer w0.2: v1(42.5,12) 42.5,13.4 43,13.9 J5.1 ; v1(49.5,11.25) 49.75,11.5 v1(49.75,17)
FAULT: J8.1 Q5.1 R31.2 U3.10 U3.13 | length 39.2
  Top Layer w0.2: v1@40.4,29.8 v1(40.4,29.9) 40.4,31.85 Q5.1 40.45,32.45 40.95,32.95 R31.2 ; U3.10 40.65,6.85 40.2,7.3 v1(40.2,8.8) U3.13
  Bottom Layer w0.2: v1(40.2,8.8) 39.5,9.5 39.5,28.9 v1@40.4,29.8 ; v1(40.4,29.9) 41.3,29.9 41.9,30.5 41.9,32.4 J8.1
FAULT_PULSE: J9.1 Q6.1 R32.2 U3.12 U4.13 | length 39.8
  Top Layer w0.2: U3.12 48.65,8.15 v1(48.75,8.25) ; v1(45.5,22) 46.412,21.088 46.412,20.788 47.2,20 48.6,20 48.896,19.704 48.896,18.829 U4.13 48.925,17.175 v1(48.75,17) ; v1(45.5,30.3) 45.5,31.85 Q6.1 45.55,32.45 46.05,32.95 R32.2
  Bottom Layer w0.2: v1(45.5,22) v1(45.5,30.3) 45.659,30.3 46.092,30.733 46.233,30.733 47.5,32 J9.1 ; v1(48.75,8.25) v1(48.75,17)
GND: C1.2 C2.1 C3.1 C4.1 C5.1 C6.1 C7.1 C8.1 C9.1 C11.1 C12.1 C13.1 C14.1 C15.1 C16.2 C17.1 C18.1 C19.1 D10.2 D12.1 J1.6 J13.1 J20.10 K1.4 pad.1@3.5,3.5 pad.1@3.5,34 Q1.2 Q2.2 Q3.2 Q4.2 Q5.2 Q6.2 R4.1 R5.1 R10.1 R15.1 R17.1 R26.1 R27.1 R28.1 R29.1 R30.1 R31.1 R32.1 RV1.1 RV2.1 RV3.1 RV4.1 RV5.1 U1.7 U3.7 U4.6 U4.8 U4.14 U5.4 U5.5 U5.6 | length 15.1
  Bottom Layer w0.2: v1(1.7,6.7) 2.4,7.4 5.2,7.4 6.1,6.5 v1(8.5,6.5) ; J13.1 v1(23,16.1)
LED2_N: J1.4 R16.1 RV2.2 | length 29.1
  Top Layer w0.2: J1.4 13.48,10.8 RV2.2 ; v1(13.202,6.002) 15.505,3.7 23,3.7 25,5.7 26.3,5.7 27,5 27,2.4 27.4,2 R16.1
  Bottom Layer w0.2: J1.4 12.18,9.325 13.202,8.303 v1(13.202,6.002)
LED2_P: D5.1 J1.3 RV3.2 | length 20.5
  Top Layer w0.2: J1.3 14.88,14.7 RV3.2 ; v1(14.9,2.3) 14.9,1.145 15.32,0.725 16.925,0.725 17.6,1.4 17.975,1.4 D5.1
  Bottom Layer w0.2: J1.3 13.25,13.07 13.25,8.75 14.9,7.1 v1(14.9,2.3)
NetC4_2: C4.2 R7.1 U4.7 | length 6.5
  Top Layer w0.305: R7.1 51.4,11.405 50.875,11.93 U4.7 50.875,14.125 51.161,14.411 51.914,14.411 52.95,13.375 C4.2
NetC9_2: C9.2 C19.2 R14.1 U4.15 | length 5.7
  Top Layer w0.2: C19.2 C9.2 ; C9.2@45.625,16.25 45.625,17.725 R14.1 46.513,17.75 47.2,17.75 47.625,18.175 U4.15
NetC10_1: C10.1 U1.1 | length 8.2
  Top Layer w0.2: v1(5.5,25.5) 5.5,23.955 U1.1 ; v1(11,25.5) C10.1
  Bottom Layer w0.2: v1(5.5,25.5) v1(11,25.5)
NetC10_2: C10.2 D12.2 L1.1 U1.8 | length 8.1
  Top Layer w0.2: C10.2 14.5,25.5
  Top Layer w0.6: U1.8 12.905,23.905
  Top Layer w1: D12.2 13.25,27.75 ; 15.7,27.3 L1.1
NetC16_1: C16.1 R25.2 U1.6 | length 3.7
  Top Layer w0.2: U1.6 11.935,21.365 12.2,21.1 13.24,21.1 C16.1 14.44,21.11 R25.2
NetC17_2: C17.2 U1.4 | length 1.7
  Top Layer w0.2: C17.2 5.5,20.045 U1.4
NetC18_2: C18.2 R25.1 | length 1.4
  Top Layer w0.2: R25.1 14.5,21.9 14.7,21.7 14.9,21.7 C18.2@15.5,21.1 ; C18.2@15.7,21.1 15.71,21.11 C18.2
NetD1_2: D1.2 R4.2 | length 2.9
  Top Layer w0.2: R4.2 11.75,4.5 12.5,3.75 D1.2
NetD2_2: D2.2 R5.2 | length 5.7
  Top Layer w0.2: R5.2 11.75,6.5 14,4.25 D2.2
NetD3_1: D3.1 K1.8 Q1.3 R23.1 | length 9.4
  Top Layer w0.2: R23.1 27.45,8.55 27.1,8.9 Q1.3 27.1,9.9 29.117,11.917 29.4,11.917 29.7,12.217 K1.8 29.9,12.3 30.4,12.3 31.013,11.688 D3.1
NetD4_2: D4.2 R15.2 | length 10
  Top Layer w0.2: D4.2 16.5,2.65 16.7,2.85 16.775,2.85 17.125,3.2 23.7,3.2 25,4.5 R15.2
NetD5_2: D5.2 R16.2 | length 7.9
  Top Layer w0.2: D5.2 23.725,2.575 24.3,2 R16.2
NetD6_2: D6.2 R19.2 | length 1.5
  Top Layer w0.2: R19.2 D6.2
NetD7_2: D7.2 R20.2 | length 1.5
  Top Layer w0.2: R20.2 D7.2
NetD8_2: D8.2 R21.2 | length 1.5
  Top Layer w0.2: R21.2 D8.2
NetD9_2: D9.2 R22.2 | length 1.5
  Top Layer w0.2: R22.2 D9.2
NetD10_1: D10.1 Q3.3 R18.1 | length 2.9
  Top Layer w0.2: Q3.3 26.1,34.4 25.8,34.7 25.8,35.15 R18.1 D10.1
NetD11_2: D11.2 R23.2 | length 2.2
  Top Layer w0.2: D11.2 28.3,6.9 28.5,7.1 R23.2
NetJ20_5: J20.5 R3.1 | length 4.6
  Top Layer w0.2: R3.1 41.7,26.2 42.955,24.945 43.555,24.945 J20.5
NetQ2_3: Q2.3 R20.1 | length 2.2
  Top Layer w0.2: R20.1 35.15,34.35 35.6,33.9 Q2.3
NetQ4_3: Q4.3 R19.1 | length 2.1
  Top Layer w0.2: R19.1 30.05,34.45 30.6,33.9 Q4.3
NetQ5_3: Q5.3 R21.1 | length 2.1
  Top Layer w0.2: R21.1 40.25,34.45 40.8,33.9 Q5.3
NetQ6_3: Q6.3 R22.1 | length 2.1
  Top Layer w0.2: R22.1 45.35,34.45 45.9,33.9 Q6.3
NetR6_1: R6.1 U4.11 | length 4.5
  Top Layer w0.305: U4.11 50.234,18.791 50.234,17.766 51.8,16.2 R6.1@53,16.2
NetR10_2: R10.2 U4.9 | length 2.7
  Top Layer w0.305: U4.9 51.525,19.413 51.862,19.75 52.75,19.75 53,19.5 R10.2@53,19.1
NetR12_1: R12.1 U4.3 | length 4.1
  Top Layer w0.2: R12.1@45.65,12.3 46,12.3 46.6,11.7 47.8,11.7 48.275,12.175 U4.3
NetR13_1: R13.1 U4.2 | length 4.4
  Top Layer w0.2: R13.1@45.25,13.6 46,13.6 46.5,13.1 46.5,12.367 46.717,12.15 47.45,12.15 47.614,12.314 47.614,13.189 U4.2
NetR24_1: R24.1 R26.2 U1.5 | length 7.7
  Top Layer w0.2: U1.5 16.095,20.095 17,21 R26.2 R24.1
RSSI_AN: C5.2 J12.1 R11.2 U5.2 | length 17.3
  Top Layer w0.2: v1(28.5,15) 29.4,15.9 35.6,15.9 36.325,16.625 36.325,18.925 36.65,19.25 R11.2 39.05,17.975 C5.2
  Bottom Layer w0.2: J12.1 26.25,15 v1(28.5,15)
RSSI_FAULT: J4.1 Q4.1 R9.1 R29.2 U3.6 U5.1 | length 44.3
  Top Layer w0.2: Q4.1 30.25,32.65 30.55,32.95 33,32.95 ; v1(32.2,29.9) 32.2,30.946 33,31.746 33,32.95 ; R29.2 33,32.95 ; v1(34.1,15.1) 35.6,15.1 36.6,16.1 ; v1(35.2,6.2) U3.6@37.2,6.2 ; U5.1 36.975,16.475 36.6,16.1 ; R9.1 37.4,15.3 36.6,16.1
  Bottom Layer w0.2: J4.1 v1(32.2,29.9) 32.2,22.7 34.1,20.8 34.1,7.3 v1(35.2,6.2)
RSSI_PWM: J3.1 J20.6 R11.1 | length 11.3
  Top Layer w0.2: R11.1 41.75,19.25 v1(42.3,18.7)
  Bottom Layer w0.2: v1(42.3,18.7) 42.4,18.8 42.4,23.9 J20.6
  Bottom Layer w0.381: J20.6 J3.1
RSSI_REF: J15.1 R8.1 R27.2 U5.3 | length 18
  Top Layer w0.2: v1(28.486,17.225) 29.411,16.3 35.3,16.3 35.654,16.654 35.654,17.429 U5.3 35.675,19.875 ; R27.2 34.925,19.875 35.675,19.875 ; R8.1 36.55,20.75 35.675,19.875
  Bottom Layer w0.2: J15.1 27.911,17.8 v1(28.486,17.225)
RTN1: J1.5 K1.3 RV1.2 | length 16.2
  Top Layer w0.2: J1.5 13.58,13.4 RV1.2 17,13.4 17.7,14.1 18.7,14.1 19.8,15.2 23.3,15.2 24.3,16.2 K1.3
STO2: D4.1 J1.2 K1.5 RV4.2 | length 21
  Top Layer w0.2: J1.2 14.78,12.1 RV4.2 17,12.1 17.65,11.45 20.35,11.45 21,12.1 21.8,12.1 22.1,12.4 K1.5 ; v1(15.6,1.4) 16.475,1.4 D4.1
  Bottom Layer w0.2: J1.2 13.6,10.92 13.6,9 15.6,7 v1(15.6,1.4)
STO_ENABLE: J10.1 Q1.1 R17.2 U3.11 | length 35.9
  Top Layer w0.2: Q1.1 26.75,10.35 28.7,12.3 28.7,12.85 ; v1(27.8,12.9) 27.85,12.85 28.7,12.85 ; v1(41,12) 39,10 32.5,10 31.5,11 31.5,12.7 30.3,13.9 29.2,13.9 28.7,13.4 28.7,12.85 ; v1(41.082,7.555) 41.109,7.527 42.773,7.527 U3.11
  Top Layer w0.305: R17.2 24,9.9 24.45,10.35 Q1.1
  Bottom Layer w0.2: J10.1 25.5,10.6 v1(27.8,12.9) ; v1(41,12) 41.041,11.959 41.041,7.596 v1(41.082,7.555)
UART_RX: J14.1 J20.2 Q3.1 R1.1 R28.2 U3.2 U4.10 | length 69.7
  Top Layer w0.2: v1@27.1,29.8 28.9,28 41.1,28 42.7,26.4 48.1,26.4 J20.2 ; v1(27.1,29.9) 25.7,29.9 25.15,30.45 25.15,32.45 25.6,32.9 R28.2 ; U3.2 39.095,8.8 41.22,10.925 46.31,10.925 46.735,10.5 v1(50.25,10.5)
  Top Layer w0.305: J20.2@50.45,23.95 50.45,20.8 50.4,20.75 50.5,20.65 50.5,20.25 50.866,19.884 50.866,18.809 U4.10
  Bottom Layer w0.2: v1(27.1,29.9) J14.1 ; v1(50.25,10.5) 50.25,15.802 50.5,16.052 J20.2
UART_TX: J20.3 R2.1 | length 3.3
  Top Layer w0.305: J20.3 48.55,23.95 48.55,20.8 R2.1@48.6,20.75
pads on no net: J1.14 J1.15 J20.4 J20.7 J20.8 J20.9 J21.1 J21.2 J21.3 J21.4 J21.5 J21.6 J21.7 J21.8 J21.9 J21.10 K1.2 K1.7 U1.3 U4.4 U4.5 U5.7

## Polygon pours and split planes (outlines as drawn)
GND on Top Layer "TOP_GND" (solid, remove dead copper, pour order 7): 0,3.5 0,34 cw(c3.5,34) 3.5,37.5 59,37.5 cw(c59,34) 62.5,34 62.5,3.5 cw(c59,3.5) 59,0 3.5,0 cw(c3.5,3.5)
3V3 on Top Layer "XBEEPWR" (solid, pour order 4): 46.7,29.2 46.7,27.6 50.3,27.6 50.3,22.6 54,22.6 54,25.5 52.5,25.5 52.5,29.2
3V3 on Top Layer "REGOUT" (solid, pour order 3): 17.7,21.5 17.7,23.5 16.5,23.5 16.5,29.5 12.5,29.5 12.5,37.5 25,37.5 25,26 20.5,21.5
NetC10_2 on Top Layer "REGSW" (solid, pour order 2): 16.5,29.5 16.5,23.5 12.5,23.5 12.5,24.5 13.5,24.5 14,25 14,26.5 13,26.5 13,29.5
24V on Top Layer "24V_L01_P000" (solid, pour order 0): 0,23.5 4.5,23.5 4.5,13 6.5,11 16,11 16,7.6 0,7.6
3V3 on Bottom Layer "BOT_PWR" (solid, pour order 6): 0,3.5 0,34 cw(c3.5,34) 3.5,37.5 59,37.5 cw(c59,34) 62.5,34 62.5,3.5 cw(c59,3.5) 59,0 3.5,0 cw(c3.5,3.5)

## Keep-outs
Keep-Out Layer:
  region: 55.2,0 62.5,0 62.5,37.5 55.2,37.5
  lines w0.5: 0,3.5 ccw(c3.5,3.5) 3.5,0 59,0 ccw(c59,3.5) 62.5,3.5 62.5,34 ccw(c59,34) 59,37.5 3.5,37.5 ccw(c3.5,34) 0,34 0,3.5

## Other copper
Top Layer:
  text "1" at 49.22,4.79 h1.52
Bottom Layer:
  text "2" at 49.22,4.79 h1.52

## Silkscreen, mask and mechanical layers (free items; w line width, h text height)
Top Overlay:
  region: 56.54,36.075 56.535,36.075 56.535,36.08 56.54,36.08
  region: 58.05,33.49 58.05,33.495 58.055,33.495 58.055,33.49
  region: 56.644,34.485 56.644,34.488 56.647,34.488 56.647,34.485
  region: 55.606,36.262 55.602,36.262 55.602,36.265 55.606,36.265
  lines w0.1: 0,18 4.5,18 ; 7.5,18 12,18 13,17 18.5,17 19.5,18 19.5,21.5 24,26 24,37.5 ; 26.3,30.5 27.9,30.5 ; 31.1,30.5 33,30.5 ; 36.3,30.5 36.5,30.5 38,30.5 ; 42.5,29.3 42.5,30.8 43.9,32.2 ; 48.1,31.9 48.4,31.6 49.7,31.6 ; 50,30.5 52,30.5 53,31.5 53,37.5
  lines w0.2: 15.25,0 15.25,6.25
  text "STATUS" at 52.616,31.5 h0.76 r90
  text "FP" at 49.954,28.454 h1.52
  text "F" at 40.354,27.554 h1.52
  text "RF" at 31.754,27.454 h1.52
  text "FF" at 36.054,27.454 h1.52
  text "RX" at 26.754,27.354 h1.52
  text "TPS54331 / Regulator" at 8.239,26.25 h0.76 r90
  text ".Project_Name" at 62,12.3 h0.76 r90
  text "RV1-5" at 19.898,8.877 h0.76 r90
  text "24V" at 13.008,3.5 h0.76 r90
  text "3V3" at 14.508,3.5 h0.76 r90
  text "WSTO" at 17.008,3.5 h0.76 r90
  text "BOTH" at 18.508,3.5 h0.76 r90
  text "POWER / GOOD" at 7,0.883 h0.76
  text "STO / ENABLED" at 19,0.883 h0.76
Bottom Overlay:
  region: 61.122,8.485 61.122,8.47 61.13,8.47 61.13,8.485 61.138,8.485 61.138,8.492 61.13,8.492 61.13,8.485
  region: 56.998,10.27 56.998,10.262 57.005,10.262 57.005,10.277 56.998,10.277
  text "RX" at 28.537,35.2 h0.76
  text "RF" at 34.041,35.2 h0.76
  text "FF" at 38.737,35.2 h0.76
  text "F" at 43.837,35.1 h0.76
  text "FP" at 48.937,35.1 h0.76
  text "PWM" at 43.937,28.313 h0.76
  text "REF" at 27.637,19.05 h0.76
  text "AN" at 27.637,12.713 h0.76
  text "24V" at 17.457,10.75 h0.76 r270
  text "3V3" at 19.957,10.75 h0.76 r270
  text "GND" at 22.457,10.75 h0.76 r270
  text "EN" at 24.957,10.75 h0.76 r270
  text "!F" at 42.937,5.6 h0.76
Bottom Solder:
  region: 28.22,3.07 28.22,3.08 28.21,3.08 28.21,3.07
  region: 51.99,-3.01 52,-3.01 52,-3 51.99,-3
Mechanical 1:
  the board outline again, w0.5

## Text inside footprints (layer, text, board x,y; h text height)
J20: Top Overlay "10" at 34,21.7 h0.6; Top Overlay "1" at 52.5,21.7 h0.5
J21: Top Overlay "10" at 52.1,3.7 h0.5; Top Overlay "1" at 34.5,3.7 h0.5